# Altium PCB PCB-ALTIUM.pcbdoc
Units mil, origin at the board's own origin, x right, y up, seen from the top; angles counter-clockwise.
Board outline 4559.05 x 4759.84 mil, 2 copper layers (Top Layer, Bottom Layer); 69 components, 40 nets, 341 pads, 84 vias.
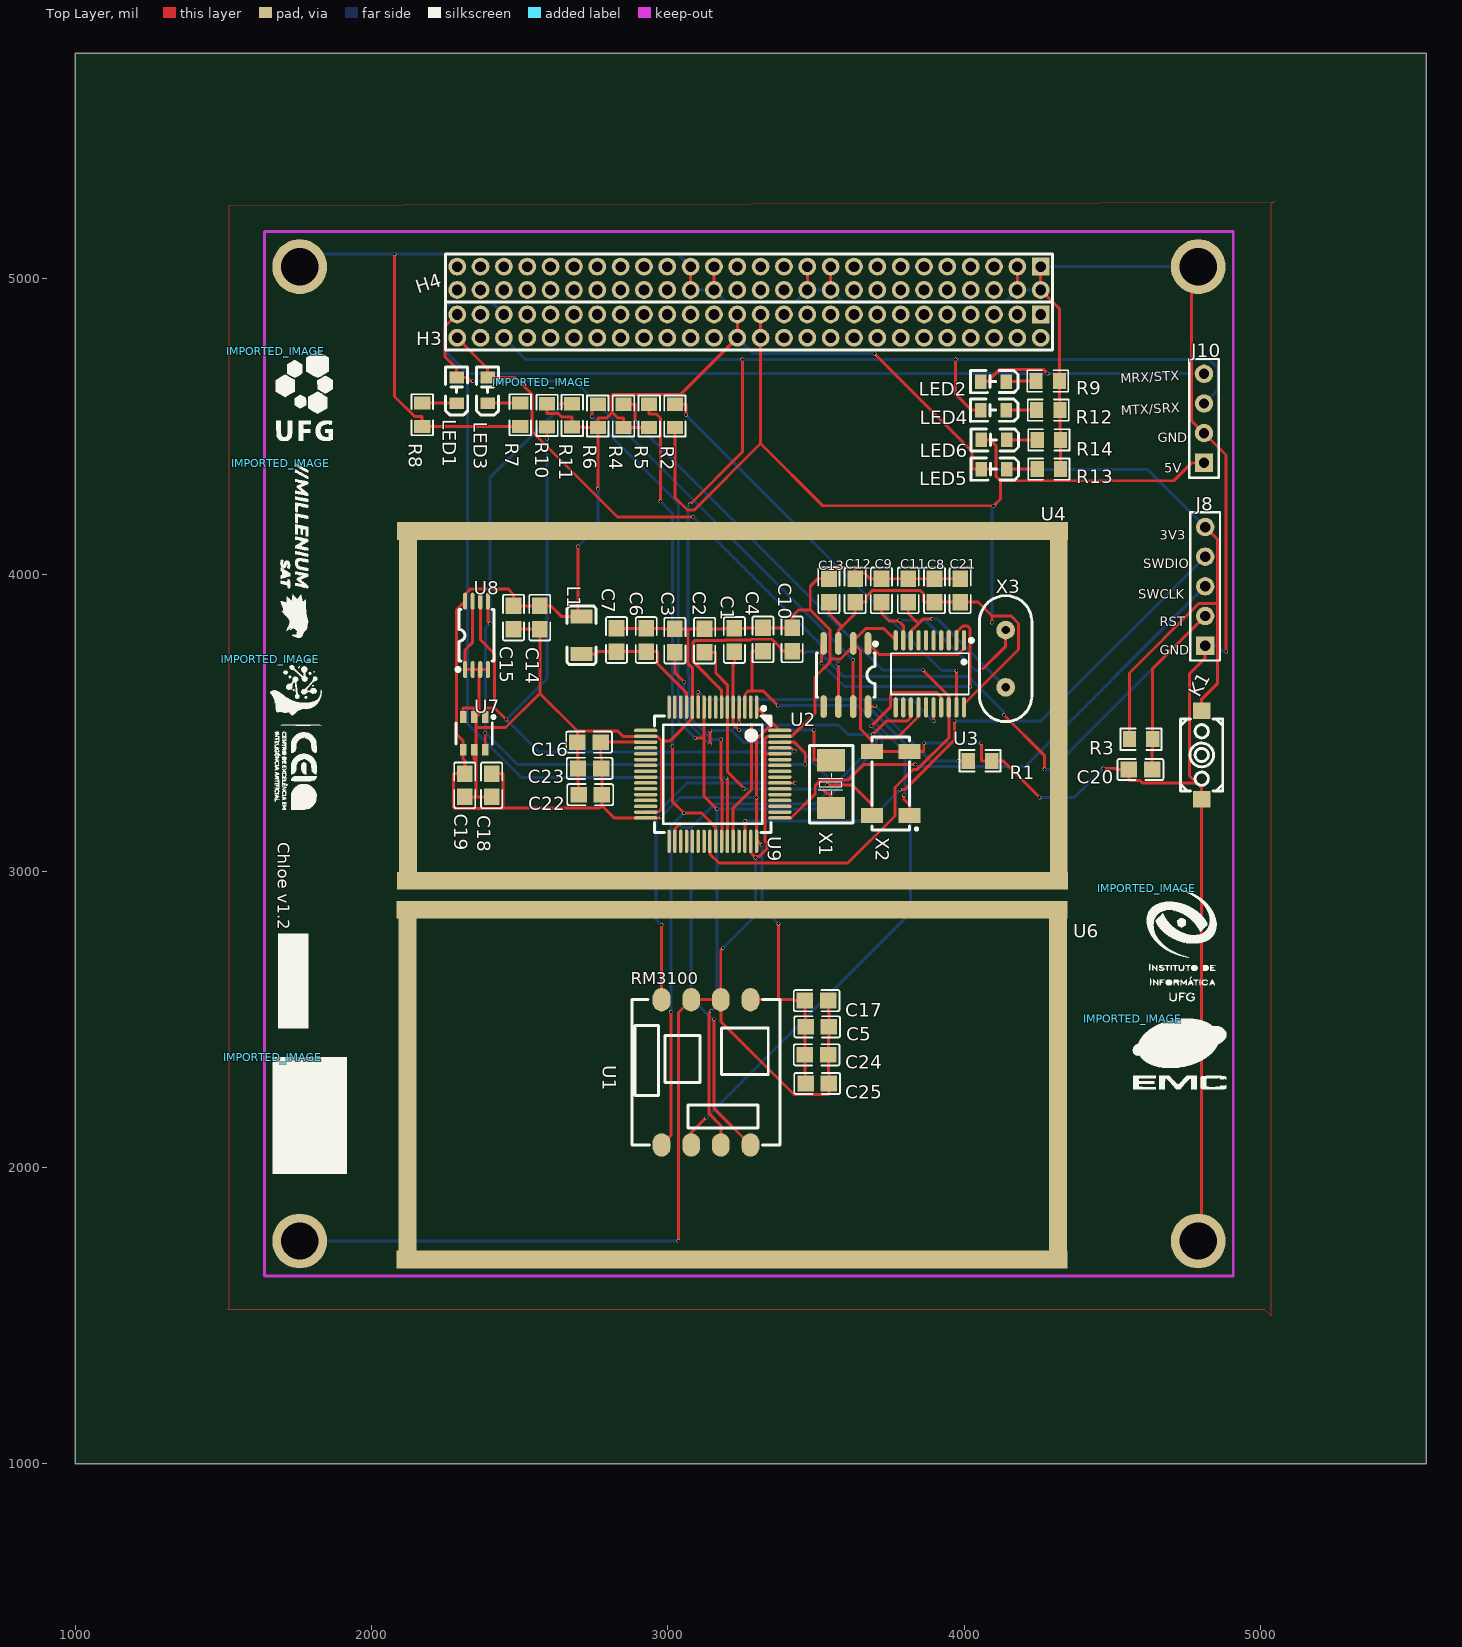
[diagram p0: Top Layer view]
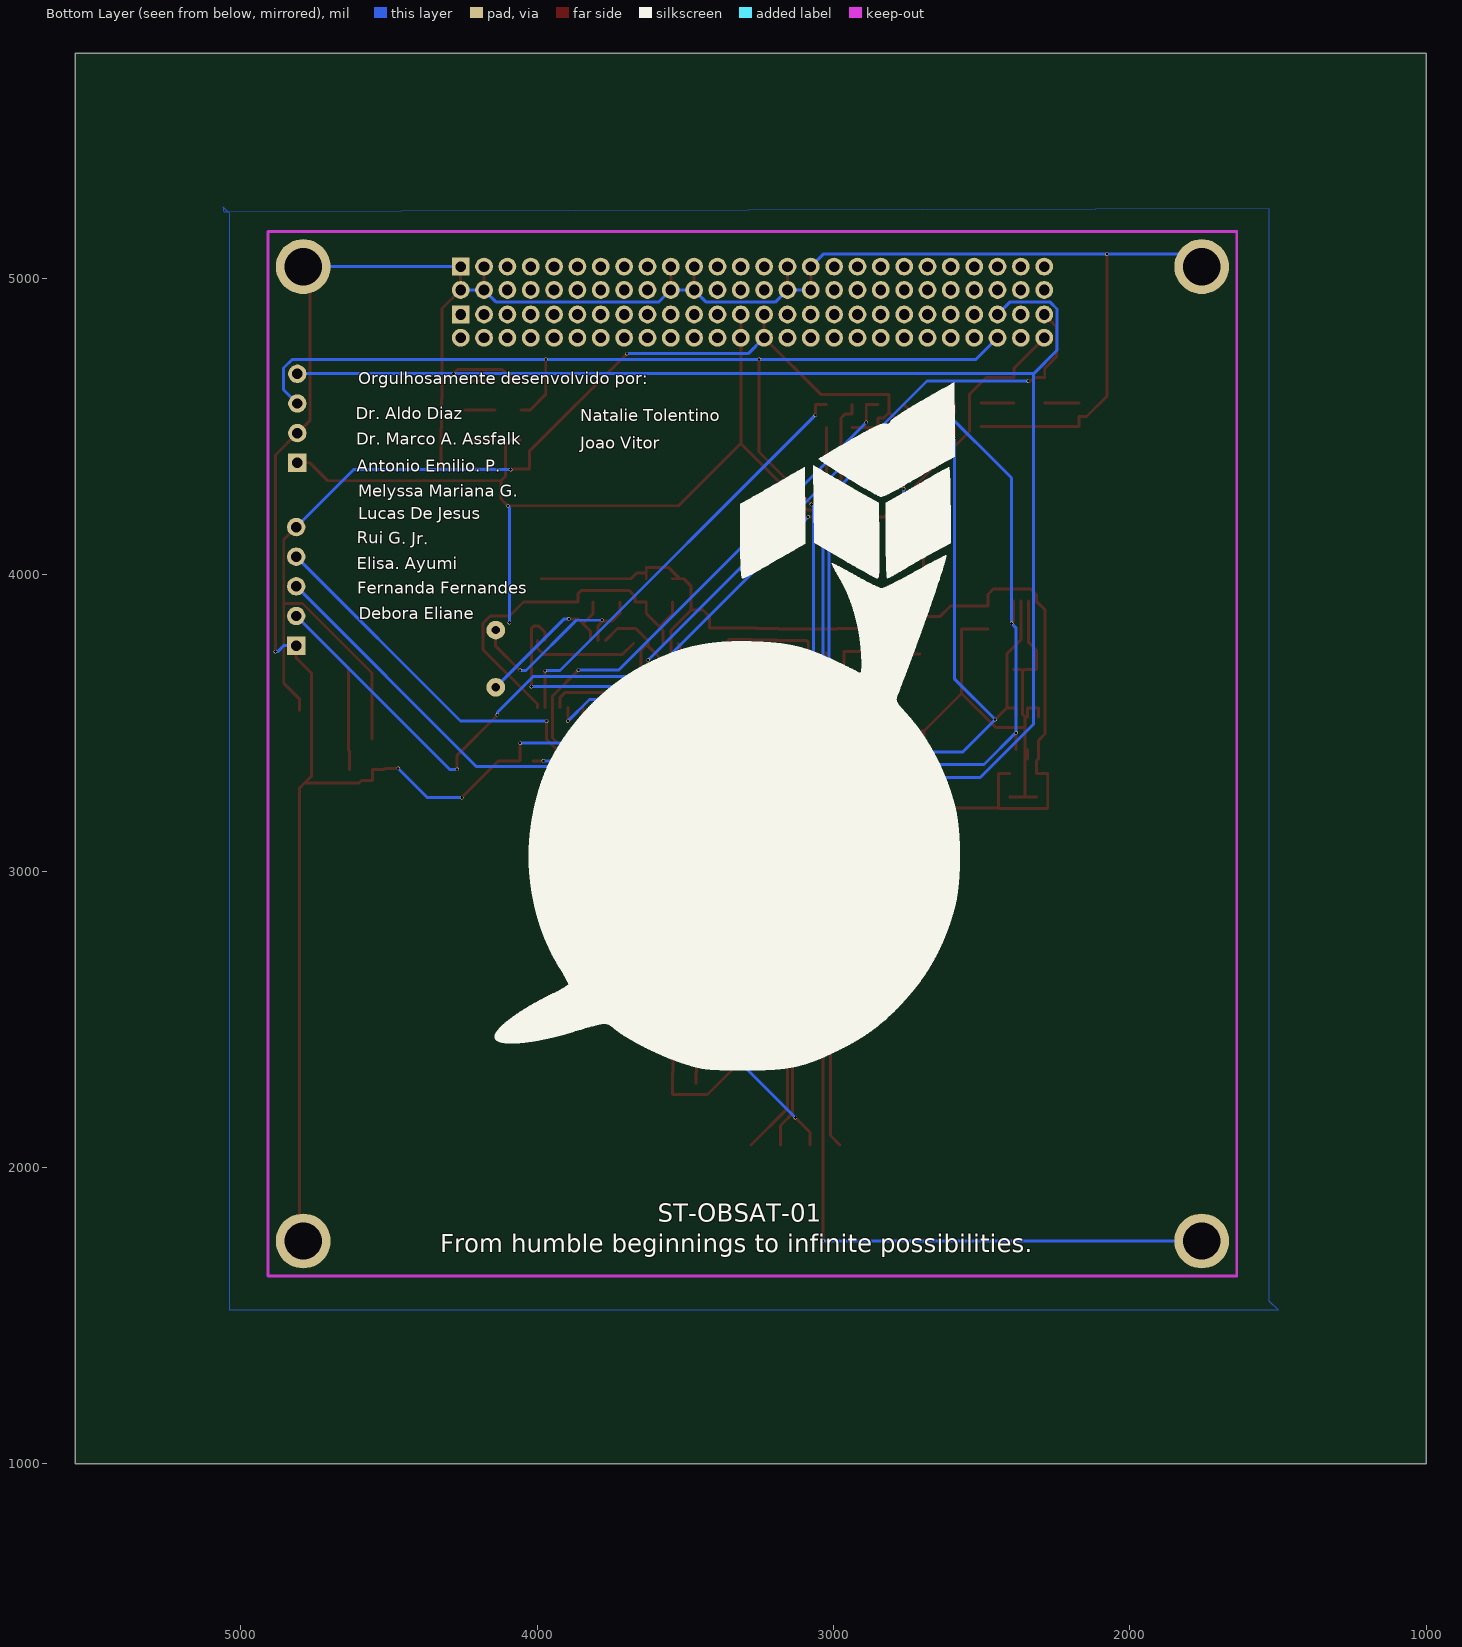
[diagram p1: Bottom Layer view, seen from below]

## Layer stack, top to bottom
Top Layer: signal copper (thickness not stored)
Dielectric: dielectric 12.6, FR-4, Dk 4.8
Bottom Layer: signal copper (thickness not stored)

## Board outline
5559.05,1000 1000,1000 1000,5759.84 5559.05,5759.84

## Components (designator, comment, footprint, x,y, rotation, side; value= is the part's Value field where it differs from the comment)
C1 "12pF" C0805 3224.41,3779.52 r270 top
C2 "12pF" C0805 3124.01,3777.55 r270 top
C3 "20pF" C0805 3023.62,3777.55 r270 top
C4 "20pF" C0805 3320.86,3781.49 r270 top
C5 "100nF" C0805 3503.93,2474.41 r180 top
C6 "1uF" C0805 2927.16,3779.52 r270 top
C7 "10nF" C0805 2826.77,3779.52 r270 top
C8 "100nF" C0805 3899.6,3946.84 r270 top
C9 "22pF" C0805 3720.47,3946.84 r270 top
C10 "100nF" C0805 3419.29,3781.49 r270 top
C11 "22pF" C0805 3811.02,3946.84 r90 top
C12 "100nF" C0805 3631.89,3946.84 r270 top
C13 "100nF" C0805 3543.3,3946.84 r270 top
C14 "100nF" C0805 2567.91,3855.31 r90 top
C15 "100nF" C0805 2479.33,3855.31 r90 top
C16 "100nF" C0805 2734.25,3435.04 r0 top
C17 "100nF" C0805 3501.96,2562.99 r180 top
C18 "100nF" C0805 2405.51,3289.37 r90 top
C19 "100nF" C0805 2314.96,3289.37 r90 top
C20 "100nF" C0805 4594.48,3342.52 r0 top
C21 "100nF" C0805 3986.22,3946.84 r270 top
C22 "100nF" C0805 2738.19,3257.87 r0 top
C23 "100nF" C0805 2736.22,3346.45 r0 top
C24 "100nF" C0805 3501.97,2379.92 r180 top
C25 "100nF" C0805 3503.93,2283.46 r180 top
H3 "X4622WV-2X26I-C40D28" HDR-TH_52P-P2.00-V-M-R2-C26-S2.00 3273.62,4838.58 r180 top
H4 "X4622WV-2X26I-C40D28" HDR-TH_52P-P2.00-V-M-R2-C26-S2.00 3273.62,4999.99 r180 top
IMPORTED_IMAGE "IMPORTED_IMAGE" IMPORTED_IMAGE 2573.86,4648.46 r0 top
IMPORTED_IMAGE "IMPORTED_IMAGE" IMPORTED_IMAGE 1677.3,4753.55 r0 top
IMPORTED_IMAGE "IMPORTED_IMAGE" IMPORTED_IMAGE 1693.3,4375.7 r0 top
IMPORTED_IMAGE "IMPORTED_IMAGE" IMPORTED_IMAGE 1657.91,3715.03 r0 top
IMPORTED_IMAGE "IMPORTED_IMAGE" IMPORTED_IMAGE 4615.85,2942.5 r0 top
IMPORTED_IMAGE "IMPORTED_IMAGE" IMPORTED_IMAGE 4568.7,2502.12 r0 top
IMPORTED_IMAGE "IMPORTED_IMAGE" IMPORTED_IMAGE 1666.67,2372.05 r0 top
J8 "SWD" HDR-M-2.54_1X5 4812.98,3960.62 r90 top
J10 "Serial 1 / console" HDR-M-2.54_1X4 4809.05,4527.55 r90 top
K1 "Tactile Switches SMD" KEY-SMD_2P-L6.2-W3.6-LS8.0 4801.18,3391.73 r90 top
L1 "10uH" L1206 2708.66,3795.27 r270 top
LED1 "Red 0805" LED0805-RD_RED 2287.43,4622.06 r90 top
LED2 "Red 0805" LED0805-RD_RED 4098.39,4651.52 r180 top
LED3 "Red 0805" LED0805-RD_RED 2391.73,4622.06 r90 top
LED4 "Red 0805" LED0805-RD_RED 4098.39,4555.02 r180 top
LED5 "Red 0805" LED0805-RD_RED 4100.39,4356.22 r180 top
LED6 "Red 0805" LED0805-RD_RED 4100.39,4454.72 r180 top
R1 "10k" R0805 4053.14,3372.04 r180 top
R2 "10k" R0805 3023.62,4535.43 r270 top
R3 "10k" R0805 4596.45,3444.88 r180 top
R4 "10k" R0805 2850.39,4535.43 r90 top
R5 "10k" R0805 2937.01,4535.43 r90 top
R6 "10k" R0805 2763.78,4535.43 r90 top
R7 "1k 0805" R0805 2501.97,4539.36 r270 top
R8 "1k 0805" R0805 2171.26,4539.36 r270 top
R9 "1k 0805" R0805 4281.49,4653.54 r0 top
R10 "10k" R0805 2592.52,4537.4 r270 top
R11 "10k" R0805 2677.16,4537.4 r90 top
R12 "1k 0805" R0805 4283.46,4555.11 r0 top
R13 "1k 0805" R0805 4285.43,4356.29 r0 top
R14 "1k 0805" R0805 4285.43,4454.72 r0 top
U1 "RM3100" "RM3100 WIT MOTION" 3078.74,2366.14 r270 top
U2 "MCP2551T-I/SN" SOIC-8_L5.0-W4.0-P1.27-LS6.0-BL 3600.39,3661.41 r180 top
U3 "MCP2515T-I/ST" TSSOP-20_L6.5-W4.4-P0.65-LS6.4-BL 3883.85,3665.35 r180 top
U4 "EMI/EMC SHIELD" "EMI/EMC SHIELD" 3143.7,3547.24 r0 top
U6 "EMI/EMC SHIELD" "EMI/EMC SHIELD" 3141.73,2269.68 r0 top
U7 "TMP100NA/3K" SOT-23-6_L2.9-W1.6-P0.95-LS2.8-BR 2346.45,3464.56 r90 top
U8 "AT24C512C-XHM-T" TSSOP-8_L4.4-W3.0-P0.65-LS6.4-BL 2354.33,3795.27 r0 top
U9 "STM32L053R8T6" LQFP-64_L10.0-W10.0-P0.50-LS12.0-BL 3151.57,3326.77 r180 top
X1 "8MHz" OSC-SMD_L5.0-W3.2 3551.18,3293.3 r270 top
X2 "32.768KHz" MC-306_4P-L8.0-W3.2-P5.5-BL 3751.97,3295.27 r90 top
X3 "16MHz" OSC-TH_L10.0-W4.5-P5.00 4139.76,3716.53 r0 top

## Footprints (in the part's own frame and the unit in brackets; to place one, negate y for a bottom-side part, rotate by r counter-clockwise, add the part's x,y. Pads: shape width x height; smd on the part's side, far side on the other; paste and mask are expansions set on the pad)
C0805 [mm]
  rect 1.41x1.35 smd paste-100 mask+0.051: 1(-1,0) 2(1,0)
  silkscreen extent -1.96,-0.9 1.96,0.9
"EMI/EMC SHIELD" [mil]
  rect 60x1240.15 smd paste+0 mask+2: 3(-1020,10) 3(1175,10)
  rect 2263.78x60 smd paste+0 mask+2: 3(75,-580) 3(75,600)
HDR-M-2.54_1X4 [mil]
  rect 62x62 hole 35 paste+0 mask+2: 1(-150,0)
  round 62 hole 35 paste+0 mask+2: 2(-50,0) 3(50,0) 4(150,0)
  silkscreen extent -200,-50 200,50
HDR-M-2.54_1X5 [mil]
  rect 62x62 hole 35 paste+0 mask+2: 1(-200,0)
  round 62 hole 35 paste+0 mask+2: 2(-100,0) 3(0,0) 4(100,0) 5(200,0)
  silkscreen extent -250,-50 250,50
HDR-TH_52P-P2.00-V-M-R2-C26-S2.00 [mil]
  rect 60x60 hole 36 paste+0 mask+2: 1(-984.25,-39.37)
  round 60 hole 36 paste+0 mask+2: 2(-984.25,39.37) 3(-905.51,-39.37) 4(-905.51,39.37) 5(-826.78,-39.37) 6(-826.78,39.37) 7(-748.03,-39.37) 8(-748.03,39.37) 9(-669.29,-39.37) 10(-669.29,39.37) 11(-590.55,-39.37) 12(-590.55,39.37) 13(-511.81,-39.37) 14(-511.81,39.37) 15(-433.07,-39.37) 16(-433.07,39.37) 17(-354.33,-39.37) 18(-354.33,39.37) 19(-275.59,-39.37) 20(-275.59,39.37) 21(-196.85,-39.37) 22(-196.85,39.37) 23(-118.11,-39.37) 24(-118.11,39.37) 25(-39.37,-39.37) 26(-39.37,39.37) 27(39.37,-39.37) 28(39.37,39.37) 29(118.11,-39.37) 30(118.11,39.37) 31(196.85,-39.37) 32(196.85,39.37) 33(275.59,-39.37) 34(275.59,39.37) 35(354.33,-39.37) 36(354.33,39.37) 37(433.07,-39.37) 38(433.07,39.37) 39(511.81,-39.37) 40(511.81,39.37) 41(590.55,-39.37) 42(590.55,39.37) 43(669.29,-39.37) 44(669.29,39.37) 45(748.03,-39.37) 46(748.03,39.37) 47(826.77,-39.37) 48(826.77,39.37) 49(905.51,-39.37) 50(905.51,39.37) 51(984.25,-39.37) 52(984.26,39.37)
  silkscreen extent -1024,-82 1024,80
IMPORTED_IMAGE [mil]
KEY-SMD_2P-L6.2-W3.6-LS8.0 [mm]
  rect 1.4x1.5 smd paste+0 mask+0.051: 1(-3.8,0) 2(3.8,0)
  silkscreen extent -3.1,-1.8 3.1,1.8
L1206 [mm]
  rect 1.2x1.9 smd paste+0 mask+0.102: 1(-1.6,0) 2(1.6,0)
  silkscreen extent -2.5,-1.25 2.5,1.25
LED0805-RD_RED [mm]
  rect 1x1.25 smd paste+0 mask+0.051: 1(-1.1,0) 2(1.1,0)
  silkscreen extent -2.1,-0.95 1.98,0.96
LQFP-64_L10.0-W10.0-P0.50-LS12.0-BL [mm]
  oval 0.3x2 smd paste+0 mask+0.051: 1(-3.75,-5.75) 2(-3.25,-5.75) 3(-2.75,-5.75) 4(-2.25,-5.75) 5(-1.75,-5.75) 6(-1.25,-5.75) 7(-0.75,-5.75) 8(-0.25,-5.75) 9(0.25,-5.75) 10(0.75,-5.75) 11(1.25,-5.75) 12(1.75,-5.75) 13(2.25,-5.75) 14(2.75,-5.75) 15(3.25,-5.75) 16(3.75,-5.75) 33(3.75,5.75) 34(3.25,5.75) 35(2.75,5.75) 36(2.25,5.75) 37(1.75,5.75) 38(1.25,5.75) 39(0.75,5.75) 40(0.25,5.75) 41(-0.25,5.75) 42(-0.75,5.75) 43(-1.25,5.75) 44(-1.75,5.75) 45(-2.25,5.75) 46(-2.75,5.75) 47(-3.25,5.75) 48(-3.75,5.75)
  oval 2x0.3 smd paste+0 mask+0.051: 17(5.75,-3.75) 18(5.75,-3.25) 19(5.75,-2.75) 20(5.75,-2.25) 21(5.75,-1.75) 22(5.75,-1.25) 23(5.75,-0.75) 24(5.75,-0.25) 25(5.75,0.25) 26(5.75,0.75) 27(5.75,1.25) 28(5.75,1.75) 29(5.75,2.25) 30(5.75,2.75) 31(5.75,3.25) 32(5.75,3.75) 49(-5.75,3.75) 50(-5.75,3.25) 51(-5.75,2.75) 52(-5.75,2.25) 53(-5.75,1.75) 54(-5.75,1.25) 55(-5.75,0.75) 56(-5.75,0.25) 57(-5.75,-0.25) 58(-5.75,-0.75) 59(-5.75,-1.25) 60(-5.75,-1.75) 61(-5.75,-2.25) 62(-5.75,-2.75) 63(-5.75,-3.25) 64(-5.75,-3.75)
  silkscreen extent -5,-5.79 5,5
MC-306_4P-L8.0-W3.2-P5.5-BL [mil]
  rect 51.2x74.8 smd paste+0 mask+4: 1(-108.27,-63) 2(108.27,-63) 3(108.27,63) 4(-108.27,63)
  silkscreen extent -157,-91 157,63
OSC-SMD_L5.0-W3.2 [mm]
  rect 1.9x2.4 smd paste+0 mask+0.051: 1(-2.05,0) 2(2.05,0)
  silkscreen extent -3.32,-1.85 3.33,1.85
OSC-TH_L10.0-W4.5-P5.00 [mm]
  round 1.6 hole 0.7 paste+0 mask+0.051: 1(0,2.45) 2(0,-2.45)
  silkscreen extent -2.25,-5.39 2.25,5.39
R0805 [mil]
  rect 44.59x54.21 smd paste-3937.01 mask+2: 1(-39.37,0) 2(39.37,0)
  silkscreen extent -69,-36 69,36
"RM3100 WIT MOTION" [mil]
  oval 78.74x60 smd paste+0 mask+4: 1(-200,200) 2(-200,100) 3(-200,0) 4(-200,-100) 5(290,200) 6(290,100) 7(290,0) 8(290,-100)
  silkscreen extent -200,-200 290,300
SOIC-8_L5.0-W4.0-P1.27-LS6.0-BL [mil]
  oval 22.38x76.78 smd paste+0 mask+2: 1(-75,-106.5) 2(-25,-106.5) 3(25,-106.5) 4(75,-106.5) 5(75,106.5) 6(25,106.5) 7(-25,106.5) 8(-75,106.5)
  silkscreen extent -106,-111 98,75
SOT-23-6_L2.9-W1.6-P0.95-LS2.8-BR [mm]
  rect 1x0.55 smd paste+0 mask+0.051: 1(1.4,-0.95) 2(1.4,0) 3(1.4,0.95) 4(-1.4,0.95) 5(-1.4,0) 6(-1.4,-0.95)
  silkscreen extent -0.9,-1.78 1.52,1.55
TSSOP-8_L4.4-W3.0-P0.65-LS6.4-BL [mm]
  oval 0.353x1.454 smd paste+0 mask+0.051: 1(-0.975,-2.927) 2(-0.325,-2.927) 3(0.325,-2.927) 4(0.975,-2.927) 5(0.975,2.927) 6(0.325,2.927) 7(-0.325,2.927) 8(-0.975,2.927)
  silkscreen extent -1.73,-3.08 1.5,2.2
TSSOP-20_L6.5-W4.4-P0.65-LS6.4-BL [mm]
  oval 0.364x1.742 smd paste+0 mask+0.051: 1(-2.925,-2.871) 2(-2.275,-2.871) 3(-1.625,-2.871) 4(-0.975,-2.871) 5(-0.325,-2.871) 6(0.325,-2.871) 7(0.975,-2.871) 8(1.625,-2.871) 9(2.275,-2.871) 10(2.925,-2.871) 11(2.925,2.871) 12(2.275,2.871) 13(1.625,2.871) 14(0.975,2.871) 15(0.325,2.871) 16(-0.325,2.871) 17(-0.975,2.871) 18(-1.625,2.871) 19(-2.275,2.871) 20(-2.925,2.871)
  silkscreen extent -3.71,-3.02 3.33,1.77

## Free pads (board coordinates)
  round 185.04 hole 125.98 paste+0 mask+4: 1(1757.87,1751.97) 1(1757.87,5039.37) 1(4789.36,1751.97) 1(4789.36,5039.37)

## Via types
v1: diameter 11.81, hole 10, Top Layer to Bottom Layer, tented both sides, 84 vias

## Nets (pads, with @x,y where several pads share a name; then routed paths per layer and width w, separated by ;. In a path a pad name is that pad's centre, name@x,y a point inside that pad or via, vN(x,y) a via of type N, cw(c..) or ccw(c..) an arc to the next point about the centre after c; other vN are vias at no path point)
3V3: C5.2 C14.2 C15.2 C16.2 C17.2 C18.2 C19.2 C22.2 C23.2 C24.2 C25.2 H3.27 H3.28 J8.5 K1.2 L1.1 LED5.2 R3.2 R4.1 R5.1 R6.1 R10.1 R11.1 U1.1 U7.4 U8.8 U9.1 U9.19 U9.32 U9.48 U9.64 | length 9399.7
  Top Layer w10: C18.2 2443.02,3328.74 2443.07,3328.68 2443.07,3212.72 ; R10.1 2592.52,4543.55 2630.56,4543.55 2642.86,4531.24 2677.17,4531.24 R11.1 2715.2,4498.02 2717.17,4496.06 2725.74,4496.06 R6.1 ; v1(2696.58,4095.47) L1.1@2696.58,3858.26 ; L1.1 L1.1@2696.58,3858.26 ; v1(2763.78,4289.74) R6.1 ; C23.2 C23.2@2775.59,3365.22 ; U9.19 C16.2 2773.62,3385.93 2775.59,3383.97 C23.2@2775.59,3365.22 ; R5.1 R4.1 2850.39,4529.28 2830.09,4529.28 2812.31,4547.06 ; v1(2976.83,3183.37) 2972.58,3179.12 U9.32 2818.8,3179.12 2777.56,3220.36 ; H3.27 H3.28 3043.37,4608.32 2815.46,4608.32 2812.31,4605.18 2812.31,4547.06 ; U1.1 3373.29,2566.14 ; U9.1 3353.35,3498.99 ; v1(3317.07,3087.13) 3303.81,3100.39 U9.48 v1(3299.21,3248.09) 3299.21,3444.86 3353.35,3498.99 ; v1(3373.29,2822.4) 3373.29,2566.14 ; U9.64 3353.35,3498.99 ; C25.2 3464.57,2320.97 3462.6,2322.95 C24.2 3462.6,2491.2 C5.2@3464.56,2493.16 ; C5.2 C5.2@3464.56,2493.16 ; v1(3697.23,4745.42) 4026.47,4416.19 4026.47,4356.22 LED5.2 4072.39,4356.22 4087.7,4356.22 v1(4089.76,4354.15) ; R3.2 4557.08,3668.64 4791.52,3903.07 4854.97,3903.07 ; K1.2 4801.18,3579.82 4854.97,3633.61 4854.97,3903.07 ; J8.5 4854.97,4118.65 4854.97,3903.07 ; 2443.07,3212.72 2769.92,3212.72 2777.56,3220.36 ; 2443.07,3212.72 2441.61,3211.26 2280.32,3211.26 2277.41,3214.18 2277.41,3328.68 2277.46,3328.74 C19.2 2314.96,3372.93 2309.06,3378.82 2309.06,3407.18 U7.4 2309.06,3440.05 2286.92,3462.2 2286.92,3881.49 U8.8 2315.94,3933.05 2335.12,3952.22 2460.47,3952.22 2479.33,3933.36 C15.2 C14.2 2605.42,3894.68 2641.84,3858.26 2660.33,3858.26 L1.1@2696.58,3858.26 ; R6.1 2763.78,4529.28 2794.53,4529.28 2812.31,4547.06 ; C23.2@2775.59,3365.22 2777.56,3363.24 C22.2 2777.56,3220.36 ; 3373.29,2566.14 3420.77,2566.14 3423.91,2562.99 C17.2 3462.6,2513.88 3464.56,2511.91 C5.2@3464.56,2493.16
  Bottom Layer w10: v1(2696.58,4095.47) 2763.78,4162.68 v1(2763.78,4289.74) ; v1(2976.83,3183.37) 3041.55,3248.09 v1(3299.21,3248.09) ; H3.28 3288.03,4745.43 v1(3697.23,4745.42) ; v1(3317.07,3087.13) 3317.07,2878.62 v1(3373.29,2822.4) ; v1(4089.76,4354.15) 4619.47,4354.15 J8.5
3V3A: C6.2 C7.2 L1.2 U9.13 | length 487
  Top Layer w10: L1.2 2756.99,3732.28 2764.87,3740.16 C7.2 C6.2 2964.67,3740.16 2964.67,3699.74 3062.99,3601.43 U9.13
5V: C8.2 C12.2 C13.2 C21.2 H3.25 H3.26 J10.1 LED6.2 R2.2 U2.3 U3.20 | length 4616.6
  Top Layer w10: R2.2 3023.62,4260.45 3066.04,4218.03 3088.64,4218.03 3312.99,4442.39 ; H3.25 H3.26 3312.99,4442.39 ; C13.2 3543.31,3868.8 3587.6,3824.51 ; U2.3 3575.39,3812.3 3587.6,3824.51 ; U3.20 3999.02,3563.74 4183.24,3747.95 4183.24,3835.34 4158.17,3860.41 4093.37,3860.41 ; LED6.2 4087.7,4454.72 4107.24,4435.18 4107.24,4331.98 4122.38,4316.85 ; v1(4093.37,3837.97) 4093.37,3860.41 ; J10.1@4809.05,4377.56 4767.12,4377.56 4706.41,4316.85 4122.38,4316.85 ; 3312.99,4442.39 3522.88,4232.49 v1(4099.19,4232.49) 4122.38,4255.69 4122.38,4316.85 ; 3587.6,3824.51 3631.89,3868.8 3631.89,3888.14 C12.2 3669.39,3907.47 3669.39,3926.22 3689.38,3946.22 3851.49,3946.22 3862.1,3935.61 3862.1,3907.47 3880.86,3907.47 C8.2 C21.2 4046.31,3907.47 4093.37,3860.41
  Bottom Layer w10: v1(4093.37,3837.97) 4093.38,4226.69 v1(4099.19,4232.49)
CAN-H: H3.51 LED1.2 U2.7 | length 2135.9
  Top Layer w10: H3.51 2248.39,4836.97 2248.39,4735.02 2287.43,4695.98 LED1.2 2322.96,4665.36 2335.3,4653.02 v1(2342.34,4653.02) ; U2.7 v1(3625.39,3712.43)
  Bottom Layer w10: v1(2342.34,4653.02) 2684.8,4653.02 v1(3625.39,3712.43)
CAN-L: H3.52 LED3.2 U2.6 | length 1981.5
  Top Layer w10: H3.52 2289.37,4798.35 2391.73,4695.98 LED3.2 2485.05,4665.36 2541.43,4608.98 2541.43,4483.1 2829.91,4194.61 v1(3085.66,4194.61) ; U2.6 v1(3575.39,3697.77)
  Bottom Layer w10: v1(3085.66,4194.61) 3575.39,3704.89 v1(3575.39,3697.77)
CAN_RX: U2.4 U3.2 | length 885.6
  Top Layer w10: v1(3517.94,3700.64) 3517.94,3760.47 U2.4 ; U3.2 3973.43,3805.57 3994.19,3826.32 4011.53,3826.32 4019.57,3818.28 v1(4019.57,3622.35)
  Bottom Layer w10: v1(3517.94,3700.64) 3596.23,3622.36 v1(4019.57,3622.35)
CAN_TX: U2.1 U3.1 | length 374.4
  Top Layer w10: U2.1 3712.18,3731.12 3978.98,3731.12 3999.02,3751.16 U3.1
CLK: U1.5 U3.14 U9.34 | length 2225.7
  Top Layer w10: U9.34 3023.62,3141.88 v1(3039.67,3157.92) ; v1(3154.94,2500.21) 3154.94,2199.93 U1.5 ; v1(3704.63,3448.68) 3773,3448.68 3845.47,3521.16 U3.14
  Bottom Layer w10: v1(3039.67,3157.92) 3051.12,3146.47 3077.78,3146.47 ; v1(3154.94,2500.21) 3150.91,2500.22 3077.78,2573.34 3077.78,3146.47 ; v1(3704.63,3448.68) 3704.63,3433.84 3497.83,3227.05 3158.35,3227.05 3077.78,3146.47
CSCAN: R4.2 U3.18 U9.40 | length 2774.1
  Top Layer w10: R4.2 2888.43,4574.8 2889.75,4573.48 v1@2889.75,4513.8 ; U9.40 3141.73,3057.82 3172.72,3026.82 3607.3,3026.82 3766.6,3186.12 3766.6,3281.59 3828.28,3343.26 3841.81,3343.26 3947.84,3449.3 U3.18 3947.84,3591.01 v1(3861.21,3677.64)
  Bottom Layer w10: v1@2889.75,4513.8 3725.9,3677.64 v1(3861.21,3677.64)
  other v1: 2889.75,4513.79
CSRM: R5.2 U1.8 U9.41 | length 2767.7
  Top Layer w10: R5.2 2937.01,4541.57 2961.93,4541.57 2975.1,4528.4 v1(2975.1,4247.43) ; U1.8 3010.08,2107.47 v1(3010.08,2524.87) ; v1(3015.16,3420.59) 3015.16,3234.55 v1(3054.12,3195.58) 3113.41,3195.59 3161.41,3147.59 U9.41
  Bottom Layer w10: v1(2975.1,4247.43) 3015.16,4207.38 v1(3015.16,3420.59) ; v1(3010.08,2524.87) 3010.08,3151.55 3022.79,3164.26 3022.79,3164.91 3032.69,3174.8 3033.34,3174.8 v1(3054.12,3195.58)
GND: C1.1 C2.1 C3.1 C4.1 C5.1 C6.1 C7.1 C8.1 C9.1 C10.1 C11.2 C12.1 C13.1 C14.1 C15.1 C16.1 C17.1 C18.1 C19.1 C20.1 C21.1 C22.1 C23.1 C24.1 C25.1 H4.1 H4.2 H4.3 H4.4 H4.19 H4.20 H4.21 H4.22 H4.29 H4.30 H4.31 H4.32 J8.1 J10.2 K1.1 pad.1 R1.1 R7.2 R8.2 R9.2 R12.2 R13.2 R14.2 U1.2 U1.3 U2.2 U3.10 U7.2 U7.3 U7.5 U8.1 U8.2 U8.3 U8.4 U8.7 U9.12 U9.18 U9.31 U9.47 U9.60 U9.63 X2.2 X2.3 | length 19791.1
  Top Layer w10: v1(2078.1,5081.39) 2078.1,4601.47 2146.35,4533.22 2171.26,4533.22 R8.2 R7.2 ; U7.3 2309.06,3550.3 2346.46,3550.3 U7.2 U7.2@2353.35,3519.68 ; C19.1 2353.35,3249.99 ; U8.7 2341.54,3771.8 2315.94,3746.2 U8.1 U8.2 2356.97,3680.03 U8.3@2362.05,3674.95 ; U7.5 2346.46,3378.82 2353.35,3378.82 ; U8.4 U8.3 U8.3@2362.05,3674.95 ; C18.1 2353.35,3249.99 ; C15.1 C14.1 2567.92,3599.51 ; C22.1 2698.82,3295.38 2696.85,3297.34 2696.85,3346.45 2696.85,3352.97 2696.85,3383.97 2694.88,3385.93 C16.1 2694.88,3468.59 2694.88,3472.55 ; C7.1 C6.1 2984.15,3818.89 2986.12,3816.93 3004.87,3816.93 C3.1 3067.24,3816.93 ; U9.31 2968.41,3198.82 2978.14,3208.55 2978.14,3439.55 ; v1(3035.53,1751.95) 3035.53,2522.93 U1.3 3079.06,2566.45 U1.2@3178.42,2566.45 ; H4.32 H4.31 ; H4.30 H4.29 ; v1(3185.84,2740.28) 3178.42,2732.86 U1.2@3178.42,2566.45 ; U9.47 3279.52,3062.55 3293.5,3048.57 v1@3295.68,3048.57 ; v1(3295.68,3045.47) v1@3295.68,3048.57 ; U9.60 3327.54,3395.66 ; H4.22 H4.21 ; C17.1 3541.34,2544.24 3541.34,2525.49 3543.31,2523.51 C5.1 3543.31,2436.91 3541.34,2434.93 C24.1 3541.34,2322.95 3543.31,2320.97 3543.31,2298.26 C25.1 3543.31,2245.97 3543.26,2245.91 3425.53,2245.91 3178.74,2492.7 U1.2 U1.2@3178.42,2566.45 ; C13.1 C13.1@3519.05,3986.22 ; H4.20 H4.19 ; C12.1 C12.1@3631.89,4005.57 ; U3.10 3728.69,3818.39 3667.28,3818.39 3625.39,3776.49 U2.2 ; v1(3864.48,3431.89) 3863.3,3430.72 3863.3,3403.55 X2.2 X2.3 3688.97,3440.07 3649.53,3479.51 3649.53,3743.78 U2.2 ; C21.1 C8.1 C11.2 C9.1 3701.72,3986.22 3682.97,3986.22 3663.62,4005.57 C12.1@3631.89,4005.57 ; v1(4057.6,3431.89) 4057.6,3373.74 4059.3,3372.05 4075.91,3372.05 R1.1 4130.47,3372.05 v1(4254.42,3248.09) ; H4.4 H4.3 ; 4257.87,4998.44 H4.2 4320.87,4897.62 R9.2 4320.87,4595.12 4322.84,4593.15 R12.2 4322.84,4494.72 4324.8,4492.76 R14.2 R13.2 ; 4257.88,4998.44 H4.1 ; v1(4469.22,3346.53) 4512.41,3346.53 4516.43,3342.51 C20.1 4555.12,3305.01 4592.62,3305.01 4600.86,3296.78 4785.01,3296.78 ; pad.1@4789.37,1751.95 4801.18,1763.77 K1.1 4801.18,3280.61 4785.02,3296.78 ; pad.1@4789.37,5039.36 4767.08,5017.07 4767.08,4519.53 4809.06,4477.56 4883.22,4403.4 v1(4883.22,3740.29) ; J8.1 4812.99,3718.7 4760.67,3666.38 4760.67,3321.14 4785.02,3296.78 ; 2353.35,3249.99 2353.35,3378.82 ; 2353.35,3378.82 2353.35,3484.22 ; 2353.35,3484.22 U7.2@2353.35,3519.68 ; 2353.35,3484.22 2452.64,3484.22 2567.92,3599.51 ; U7.2@2353.35,3519.68 2362.05,3528.39 U8.3@2362.05,3674.95 ; 2567.92,3599.51 2694.88,3472.55 ; 2694.88,3472.55 2694.93,3472.59 2831.03,3472.59 2848.91,3454.72 U9.18 2962.97,3454.72 2978.14,3439.55 ; 2978.14,3439.55 3007.8,3439.55 3082.67,3514.41 U9.12 3082.67,3685.99 3067.24,3701.41 3067.24,3816.93 ; 3067.24,3816.93 C2.1 3184.93,3816.93 3186.9,3818.89 C1.1 3261.91,3818.89 3263.88,3820.86 C4.1 3381.79,3820.86 C10.1 3419.29,3859.55 3440.75,3881.01 3480.41,3881.01 ; v1@3295.68,3048.57 3307.5,3048.57 3335.14,3076.2 3335.14,3093.01 3327.54,3100.61 3327.54,3395.66 ; 3327.54,3395.66 3327.54,3446.74 3335.51,3454.72 U9.63 3418.17,3454.72 3496.14,3532.68 3496.14,3654.97 3547.71,3706.55 3547.71,3715.38 ; 3480.41,3881.01 3547.71,3813.72 3547.71,3715.38 ; 3480.41,3881.01 3480.41,3960.82 3505.8,3986.22 C13.1@3519.05,3986.22 ; C13.1@3519.05,3986.22 3557.74,4024.91 3631.89,4024.91 C12.1@3631.89,4005.57 ; 3547.71,3715.38 3582.51,3715.38 3625.39,3758.26 U2.2
  Bottom Layer w10: pad.1@1757.88,1751.95 v1(3035.53,1751.95) ; pad.1@1757.88,5039.36 1799.91,5081.4 v1(2078.1,5081.39) 3034.74,5081.4 H4.31 ; H4.32 H4.30 3196.85,4919.28 3429.13,4919.28 H4.22 H4.20 3590.55,4919.28 4137.79,4919.28 H4.4 H4.2 ; v1(3185.84,2740.28) 3295.68,2850.12 v1(3295.68,3045.47) ; v1(3864.48,3431.89) v1(4057.6,3431.89) ; v1(4254.42,3248.09) 4370.78,3248.09 v1(4469.22,3346.53) ; H4.1 pad.1@4789.37,5039.36 ; J8.1 4854.92,3760.62 4875.25,3740.3 v1(4883.22,3740.29)
INT_CAN: U3.13 U9.44 | length 1026.5
  Top Layer w10: U9.44 3220.47,3212.93 3282.19,3274.66 v1(3282.19,3492.94) ; v1(3692.09,3461.4) 3736.91,3506.22 3807.94,3506.22 3819.88,3518.16 U3.13
  Bottom Layer w10: v1(3282.19,3492.94) 3575.81,3492.95 3607.35,3461.41 v1(3692.09,3461.4)
IRQ4: U1.4 U9.55 | length 1200
  Top Layer w10: U1.4 v1(2978.74,2818.43) ; U9.55 v1(3429.91,3297.23)
  Bottom Layer w10: v1(2978.74,2818.43) 2959.55,2837.62 2959.55,3192.49 3064.3,3297.24 v1(3429.91,3297.23)
LED1_1: LED1.1 R8.1 | length 116.2
  Top Layer w10: R8.1 2251.89,4578.73 LED1.1
LED2_1: LED2.1 R9.1 | length 101.3
  Top Layer w10: LED2.1 4172.32,4651.52 4174.34,4653.53 R9.1
LED3_1: LED3.1 R7.1 | length 110.2
  Top Layer w10: LED3.1 2427.26,4578.74 R7.1
LED4_1: LED4.1 R12.1 | length 102.4
  Top Layer w10: LED4.1 4172.32,4555.02 4172.42,4555.11 R12.1
MISO: R6.2 U1.6 U3.17 U9.10 | length 3902.3
  Top Layer w10: v1(2743.33,4533.18) 2743.33,4554.35 R6.2 ; v1(3092.07,3448.43) 3122.04,3448.43 ; U9.10 3122.04,3448.43 ; v1(3146.59,2528.39) 3138.05,2519.86 3138.05,2182.61 3178.74,2141.91 U1.6 ; v1(3165.33,3209.08) 3122.04,3252.38 3122.04,3448.43 ; v1(3686.61,3488.84) 3750.55,3552.78 3750.55,3593.03 3759.24,3601.72 3906.79,3601.72 3922.25,3586.26 U3.17@3922.25,3552.32
  Bottom Layer w10: v1(2743.33,4533.18) 3035.09,4241.43 3035.09,3505.41 v1(3092.07,3448.43) ; v1(3146.59,2528.39) 3165.33,2547.14 v1(3165.33,3209.08) 3502.45,3209.09 3721.97,3428.61 3721.97,3455.51 3688.63,3488.84 v1(3686.61,3488.84)
MOSI: U1.7 U3.16 U9.11 | length 2799.6
  Top Layer w10: U1.7 3078.74,2118.26 v1(3128.63,2168.15) ; U9.11 v1(3102.36,3604.78) ; v1@3896.65,3505.7 U3.16@3896.65,3552.32
  Bottom Layer w10: v1(3102.36,3604.78) 3128.47,3578.68 3679.48,3578.68 ; v1(3128.63,2168.15) 3817.86,2857.39 3817.86,3412.59 3679.48,3550.97 3679.48,3578.68 ; v1@3896.65,3505.7 3823.67,3578.68 3679.48,3578.68
  other v1: 3896.65,3505.69
MRX/STX1: H3.47 J10.4 LED2.2 U9.43 | length 5562.7
  Top Layer w10: v1(3196.88,3315.57) 3200.78,3311.68 U9.43 ; LED2.2 4085.7,4651.52 4085.7,4659.18 4118.15,4691.62 4268.95,4691.62 4281.49,4679.09 v1(4281.49,4678.06)
  Bottom Layer w10: H3.47@2446.85,4877.94 2405.51,4919.28 2268.56,4919.28 2245.75,4896.48 2245.75,4757.07 2324.76,4678.06 ; v1(3196.88,3315.57) 2505.27,3315.57 2324.76,3496.09 2324.76,4678.06 ; J10.4@4809.06,4677.56 4808.55,4678.06 v1(4281.49,4678.06) 2324.76,4678.06
MTX/SRX1: H3.48 J10.3 LED4.2 U9.42 | length 4582.6
  Top Layer w10: v1(3074.63,4236.96) 3251.3,4413.64 v1(3251.3,4726.1) ; v1(3180,3444.11) 3180,3308.59 3183.38,3305.22 3183.38,3102.68 U9.42 ; v1(3971.07,4726.1) 3971.07,4608.41 4024.47,4555.02 LED4.2
  Bottom Layer w10: H3.48@2446.85,4799.2 2519.94,4726.11 v1(3251.3,4726.1) v1(3971.07,4726.1) 4826.53,4726.1 4855.77,4696.86 4855.77,4624.27 J10.3@4809.06,4577.56 ; v1(3074.63,4236.96) 3068.41,4230.74 3068.41,3662.62 3071.55,3659.49 3071.55,3520.53 3147.97,3444.11 v1(3180,3444.11)
OSC32_IN: C4.2 U9.3 X2.1 | length 1068
  Top Layer w10: U9.3 3259.84,3595.76 3272.35,3608.28 3283.36,3608.28 ; C4.2 3316.1,3742.12 3314.5,3742.12 3283.36,3742.12 3283.36,3608.28 ; v1(3371.42,3558.16) 3321.31,3608.28 3283.36,3608.28 ; v1(3796.61,3256.27) 3796.61,3241.89 3814.97,3223.53 X2.1
  Bottom Layer w10: v1(3371.42,3558.16) 3641.88,3558.16 3800.42,3399.62 3800.42,3260.09 v1(3796.61,3256.27)
OSC32_OUT: C3.2 U9.4 X2.4 | length 1199.9
  Top Layer w10: C3.2 3023.62,3669.8 v1(3054.67,3638.74) ; v1(3142.27,3427.23) v1(3142.27,3474.14) ; v1@3240.15,3499.14 U9.4 ; v1(3537.78,3290.86) 3621.64,3290.86 3688.97,3223.53 X2.4
  Bottom Layer w10: v1(3054.67,3638.74) 3054.67,3514.84 v1(3142.27,3427.23) ; v1(3142.27,3474.14) 3215.15,3474.14 ; v1@3240.15,3499.14 3215.15,3474.14 ; v1(3537.78,3290.86) 3537.78,3319.03 3422.58,3434.24 3255.06,3434.24 3215.15,3474.14
  other v1: 3240.15,3499.14
OSCIN: C1.2 U9.5 X1.1 | length 686.9
  Top Layer w10: C1.2 3224.41,3701.47 3220.47,3697.53 U9.5 3220.47,3494.97 v1(3240.23,3475.2) ; v1(3493.01,3475.2) 3493.01,3374.01 X1.1
  Bottom Layer w10: v1(3240.23,3475.2) v1(3493.01,3475.2)
OSCOUT: C2.2 U9.6 X1.2 | length 888.3
  Top Layer w10: C2.2 3161.52,3738.18 3161.52,3667.93 3200.78,3628.66 U9.6 3200.78,3335.55 3255.78,3280.55 v1(3255.78,3276.72) ; v1(3520.89,3276.72) 3536.69,3260.93 3551.18,3260.93 X1.2
  Bottom Layer w10: v1(3255.78,3276.72) v1(3520.89,3276.72)
R13_1: LED5.1 R13.1 | length 102.4
  Top Layer w10: LED5.1 4174.32,4356.22 4174.4,4356.3 R13.1
R14_1: LED6.1 R14.1 | length 102.4
  Top Layer w10: LED6.1 R14.1
RESET: C10.2 C20.2 J8.2 R3.1 U9.7 | length 3016.9
  Top Layer w10: U9.7 3181.1,3610.14 3085.33,3705.91 3085.33,3771.74 3090.76,3777.16 3191.57,3777.16 3193.29,3778.89 3277.38,3778.89 3280.62,3782.12 3351.16,3782.12 3381.79,3751.49 3381.79,3742.12 3409.92,3742.12 C10.2 3456.8,3742.12 v1(3458.63,3740.29) ; v1(4133.87,3526.62) 4270,3390.49 v1(4270,3343.31) ; C20.2 4633.86,3404.88 4635.83,3406.84 R3.1 4635.83,3683.47 J8.2
  Bottom Layer w10: v1(3458.63,3740.29) 3508.81,3740.3 3591.89,3657.22 4012.2,3657.22 4133.87,3535.55 v1(4133.87,3526.62) ; v1(4270,3343.31) 4295.67,3343.32 J8.2
S$1045: 
S$1126: 
S$590471: 
S$590712: 
SCL: R10.2 U7.1 U8.6 U9.61 | length 2615.1
  Top Layer w10: U8.6 2367.13,3780.86 2415.51,3732.49 2415.51,3550.3 ; U7.1@2383.86,3519.68 2383.86,3550.3 2415.51,3550.3 ; v1(2454.64,3511.16) 2415.51,3550.3 ; v1(2592.52,4459.01) R10.2 ; U9.61 3417.33,3415.34 v1(3427.4,3405.27)
  Bottom Layer w10: v1(2592.52,4459.01) 2592.52,3649.05 v1(2454.64,3511.16) 2564.16,3401.64 3423.77,3401.64 v1(3427.4,3405.27)
SDA: R11.2 U7.6 U8.5 U9.62 | length 2652.2
  Top Layer w10: U7.6@2383.86,3409.45 v1(2383.86,3466.57) ; U8.5 2392.72,3842.45 v1(2399.47,3835.7) ; v1(2637.96,4565.19) 2639.13,4566.36 2639.13,4576.77 R11.2 ; U9.62 3426.73,3435.03 3463.52,3398.24 v1(3463.52,3359.21)
  Bottom Layer w10: v1(2383.86,3466.57) v1@2385.02,3466.57 ; v1(2637.96,4565.19) 2399.47,4326.7 v1(2399.47,3835.7) 2385.02,3821.26 v1@2385.02,3466.57 ; v1(3463.52,3359.21) 2492.38,3359.22 v1@2385.02,3466.57
SWDCLK: J8.3 U9.49 | length 1780.2
  Top Layer w10: U9.49 3415.6,3179.12 3497.27,3260.8 3497.27,3287.45 3517.56,3307.74 3609.62,3307.74 3662.02,3360.14 v1(3834.82,3360.14)
  Bottom Layer w10: v1(3834.82,3360.14) 3841.84,3353.12 4205.48,3353.12 J8.3
SWDIO: J8.4 U9.46 | length 2027.7
  Top Layer w10: U9.46 3260.3,3100.86 v1(3260.3,3169.32) ; v1(3783.54,3274.66) 3798.97,3274.66 3967.81,3443.51 v1(3967.81,3506.11)
  Bottom Layer w10: v1(3260.3,3169.32) 3678.2,3169.32 v1(3783.54,3274.66) ; v1(3967.81,3506.11) 4258.47,3506.11 J8.4
U2_8: R1.2 U2.8 | length 417
  Top Layer w10: U2.8 3695.75,3554.91 v1(3699.21,3558.37) ; v1(3979.37,3372.04) R1.2
  Bottom Layer w10: v1(3699.21,3558.37) 3885.54,3372.05 v1(3979.37,3372.04)
U3_8: C11.1 U3.8 X3.2 | length 550.8
  Top Layer w10: C11.1 3811.02,3868.8 3845.43,3834.39 ; U3.8 3819.88,3808.84 3845.43,3834.39 ; v1(3892.64,3851) 3862.05,3851.01 3845.43,3834.39
  Bottom Layer w10: v1(3892.64,3851) 3908.84,3851.01 X3.2
U3_9: C9.2 U3.9 X3.1 | length 699.6
  Top Layer w10: C9.2 3720.47,3868.78 3745.71,3843.55 v1@3778.4,3843.55 ; v1(3780.97,3846.19) 3780.97,3846.11 v1@3778.4,3843.55 ; U3.9 3794.29,3827.66 v1@3778.4,3843.55 ; v1(4057.64,3676.78) 4139.77,3758.91 X3.1
  Bottom Layer w10: v1(3780.97,3846.19) 3868.45,3846.2 4037.86,3676.78 v1(4057.64,3676.78)
U3_19: R2.1 U3.19 | length 1467.6
  Top Layer w10: R2.1 3061.66,4574.81 v1(3061.66,4538.21) ; U3.19 v1(3973.43,3676.64)
  Bottom Layer w10: v1(3061.66,4538.21) 3923.23,3676.64 v1(3973.43,3676.64)
pads on no net: H3.1 H3.2 H3.3 H3.4 H3.5 H3.6 H3.7 H3.8 H3.9 H3.10 H3.11 H3.12 H3.13 H3.14 H3.15 H3.16 H3.17 H3.18 H3.19 H3.20 H3.21 H3.22 H3.23 H3.24 H3.29 H3.30 H3.31 H3.32 H3.33 H3.34 H3.35 H3.36 H3.37 H3.38 H3.39 H3.40 H3.41 H3.42 H3.43 H3.44 H3.45 H3.46 H3.49 H3.50 H4.5 H4.6 H4.7 H4.8 H4.9 H4.10 H4.11 H4.12 H4.13 H4.14 H4.15 H4.16 H4.17 H4.18 H4.23 H4.24 H4.25 H4.26 H4.27 H4.28 H4.33 H4.34 H4.35 H4.36 H4.37 H4.38 H4.39 H4.40 H4.41 H4.42 H4.43 H4.44 H4.45 H4.46 H4.47 H4.48 H4.49 H4.50 H4.51 H4.52 U2.5 U3.3 U3.4 U3.5 U3.6 U3.7 U3.11 U3.12 U3.15 U4.3 U6.3 U9.2 U9.8 U9.9 U9.14 U9.15 U9.16 U9.17 U9.20 U9.21 U9.22 U9.23 U9.24 U9.25 U9.26 U9.27 U9.28 U9.29 U9.30 U9.33 U9.35 U9.36 U9.37 U9.38 U9.39 U9.45 U9.50 U9.51 U9.52 U9.53 U9.54 U9.56 U9.57 U9.58 U9.59

## Polygon pours and split planes (outlines as drawn)
GND on Bottom Layer (solid): 5039.36,5220.47 5039.36,1519.68 1500,1519.68 1529.53,1549.21 1529.53,5234.24 5043.33,5224.43 5039.36,5220.47
GND on Bottom Layer (solid): 5055.11,5224.4 5043.33,5224.43 5059.05,5240.15 5059.05,5228.34 5055.11,5224.4
GND on Top Layer (solid): 5033.46,5248.02 5033.46,1500 5013.77,1519.68 1513.78,1519.68 1519.68,1525.59 1519.68,5246.06 5041.32,5255.89 5033.46,5248.02
GND on Top Layer (solid): 5041.32,5255.89 5045.27,5259.84 5045.27,5255.9 5041.32,5255.89

## Silkscreen, mask and mechanical layers (free items; w line width, h text height)
Top Overlay:
  region: 1686.02,2789.38 1686.02,2470.48 1786.41,2470.48 1786.41,2789.38
  text "MRX/STX" at 4528.38,4645.69 h31.5 r3
  text "MTX/SRX" at 4530.35,4537.42 h31.5 r3
  text "GND" at 4653.54,4446.85 h31.5
  text "5V" at 4675.2,4344.48 h31.5
  text "3V3" at 4659.45,4118.1 h31.5
  text "SWDIO" at 4604.33,4021.66 h31.5
  text "SWCLK" at 4586.62,3919.28 h31.5
  text "RST" at 4659.45,3826.78 h31.5
  text "GND" at 4659.45,3730.32 h31.5
  text "Chloe v1.2" at 1684.41,3096.45 h40.63 r270
  text "RM3100" at 2874.02,2617.48 h40.63
Bottom Overlay:
  text "Orgulhosamente desenvolvido por:" at 4604.33,4643.07 h40.63
  text "Dr. Aldo Diaz" at 4612.2,4524.96 h40.63
  text "Natalie Tolentino" at 3854.33,4517.08 h40.63
  text "Dr. Marco A. Assfalk" at 4610.23,4438.34 h40.63
  text "Joao Vitor" at 3854.34,4424.53 h40.63
  text "Antonio Emilio. P." at 4608.26,4347.79 h40.63
  text "Melyssa Mariana G." at 4604.33,4263.15 h40.63
  text "Lucas De Jesus" at 4604.33,4186.37 h40.63
  text "Rui G. Jr." at 4608.62,4105.66 h40.63 r1
  text "Elisa. Ayumi" at 4608.27,4019.05 h40.63
  text "Fernanda Fernandes" at 4606.3,3936.37 h40.63
  text "Debora Eliane" at 4602.36,3849.76 h40.63
  text "ST-OBSAT-01" at 3592.52,1816.3 h60.31
  text "From humble beginnings to infinite possibilities." at 4326.77,1713.94 h60.31